# EAGLE board PIC16F727 MCU v1.1_2 (EAGLE 5.07)
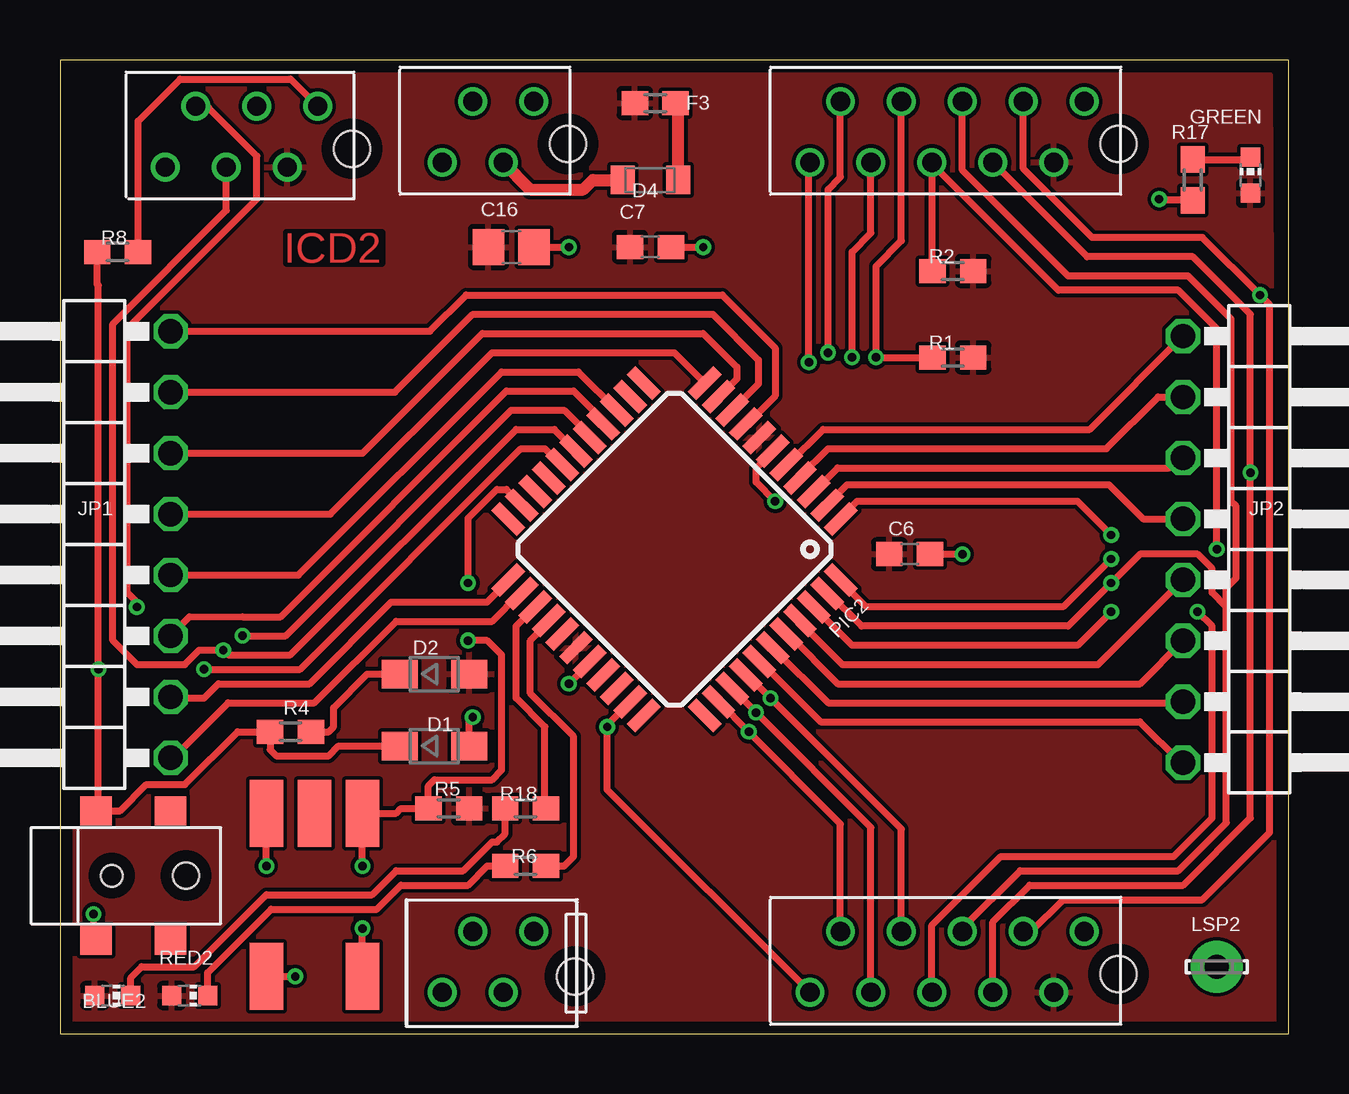
[diagram p0: board, top side]
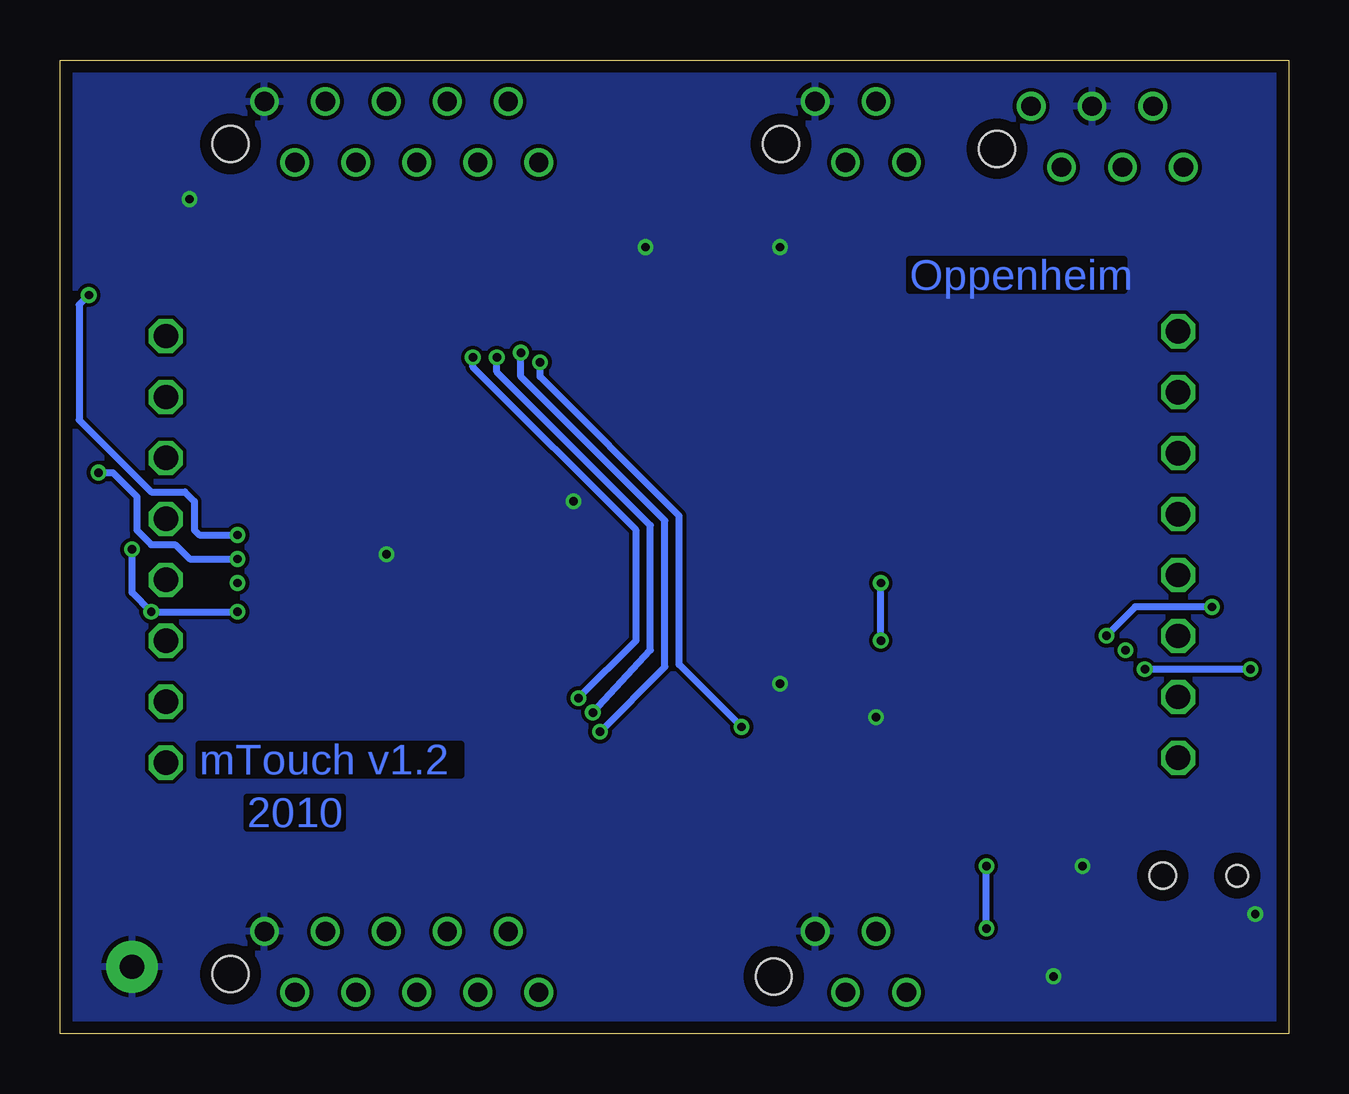
[diagram p1: board, bottom side, seen from below]

Size 51.2 x 40.6 mm. Coordinates in mm from the lower left corner, seen from the top.
Outline: 0,0 51.2,0 51.2,40.6 0,40.6 0,0
Copper layers (1*16): Top 0.035mm / dielectric 1.5mm / Bottom 0.035mm
Design rules "PCB-POOL - 2 layer, edited *": minimum track width 6mil, minimum drill 12mil, track to track 6mil, track to pad 8mil, pad to pad 6mil, via to via 6mil, smd to smd 6mil, copper to edge 20mil, drill to drill 8mil, minimum pad ring 8mil, minimum via ring 6mil, stop-mask expansion 3mil, vias tented up to drill 0.35mm, thermal gap 8mil

## Footprints (pad centres in the part's own frame; a part is rotated, then mirrored left to right if it is on the bottom)
CHIP-LED0603 = smd 0.8 x 0.8: A 0,-0.75; C 0,0.75
C0603 = smd 1.1 x 1: 1 -0.85,0; 2 0.85,0
C0805 = smd 1.3 x 1.5: 1 -0.95,0; 2 0.95,0
MICROMATCH-6H = drill 0.8 round: P1 -3.81,-1.27; P2 -2.54,1.27; P3 -1.27,-1.27; P4 0,1.27; P5 1.27,-1.27; P6 2.54,1.27 | hole 1.5: 3.96,-0.5
MICROMATCH-4H-PLUGWITHHOLE = drill 0.8 round: .1 1.27,1.27; .2 0,-1.27; .3 -1.27,1.27; .4 -2.54,-1.27 | hole 1.5: -4.26,0.6
MICROMATCH-4H = drill 0.8 round: P1 -1.27,-1.27; P2 0,1.27; P3 1.27,-1.27; P4 2.54,1.27 | hole 1.5: 3.96,-0.5
MICROMATCH-10H = drill 0.8 round: P1 -6.35,-1.27; P2 -5.08,1.27; P3 -3.81,-1.27; P4 -2.54,1.27; P5 -1.27,-1.27; P6 0,1.27; P7 1.27,-1.27; P8 2.54,1.27; P9 3.81,-1.27; P10 5.08,1.27 | hole 1.5: 6.5,-0.5
SOD323-W = smd 1.5 x 1.2: A 1.45,0; C -1.45,0
SOD110-W = smd 1 x 1.2: A 1.15,0; C -1.15,0
R0603 = smd 1.1 x 1: 1 -0.85,0; 2 0.85,0
1X08/90 = drill 1.016 octagon: 1 -8.89,-3.81; 2 -6.35,-3.81; 3 -3.81,-3.81; 4 -1.27,-3.81; 5 1.27,-3.81; 6 3.81,-3.81; 7 6.35,-3.81; 8 8.89,-3.81
LSP10 = drill 1.016 pad 2.159 round: MP 0,0
TQFP44 = smd 1.5 x 0.5: 1 -5.8,4; 2 -5.8,3.2; 3 -5.8,2.4; 4 -5.8,1.6; 5 -5.8,0.8; 6 -5.8,0; 7 -5.8,-0.8; 8 -5.8,-1.6; 9 -5.8,-2.4; 10 -5.8,-3.2; 11 -5.8,-4; 23 5.8,-4; 24 5.8,-3.2; 25 5.8,-2.4; 26 5.8,-1.6; 27 5.8,-0.8; 28 5.8,0; 29 5.8,0.8; 30 5.8,1.6; 31 5.8,2.4; 32 5.8,3.2; 33 5.8,4 | smd 0.5 x 1.5: 12 -4,-5.8; 13 -3.2,-5.8; 14 -2.4,-5.8; 15 -1.6,-5.8; 16 -0.8,-5.8; 17 0,-5.8; 18 0.8,-5.8; 19 1.6,-5.8; 20 2.4,-5.8; 21 3.2,-5.8; 22 4,-5.8; 34 4,5.8; 35 3.2,5.8; 36 2.4,5.8; 37 1.6,5.8; 38 0.8,5.8; 39 0,5.8; 40 -0.8,5.8; 41 -1.6,5.8; 42 -2.4,5.8; 43 -3.2,5.8; 44 -4,5.8
SDS_SIDE_ACTUATED_SWITCH = smd 1.3 x 1.2: 1 2.1,2.7; 2 2.1,-2.7; 3 -1,2.7; 4 -1,-2.7 | hole 1.1: -1.65,0 | hole 0.9: 1.45,0
DTSL-61K-B = smd 2.8 x 1.4: P$1 -3.4,2; P$2 3.4,2; P$3 -3.4,-2; P$4 3.4,-2; P$5 3.4,0

## Placement (x,y rotation side)
BLUE2  LED  [CHIP-LED0603]  2.2,1.6 270 top
C6  0.1uF  [C0603]  35.4,20 0 top
C7  1uF  [C0603]  24.6,32.8 0 top
C16  10uF  [C0805]  18.8,32.8 0 top
CON2  MICROMATCH_6  [MICROMATCH-6H]  8.2,37.4 0 top
CON3  MICROMATCH_4  [MICROMATCH-4H-PLUGWITHHOLE]  17.2,3 180 top
CON4  MICROMATCH_4SOCKET  [MICROMATCH-4H]  17.2,37.6 0 top
CON5  MICROMATCH_10HORIZONTAL  [MICROMATCH-10H]  37.6,37.6 0 top
CON7  MICROMATCH_10HORIZONTAL  [MICROMATCH-10H]  37.6,3 0 top
D1  8.2V  [SOD323-W]  15.6,12 0 top
D2  schottky  [SOD323-W]  15.6,15 0 top
D4  BAT254  [SOD110-W]  24.6,35.6 180 top
F3  FUSE-SMT  [R0603]  24.8,38.8 180 top
GREEN  LED  [CHIP-LED0603]  49.6,35.8 0 top
JP1  HEADER  [1X08/90]  0.8,20.4 90 top
JP2  HEADER  [1X08/90]  50.6,20.2 270 top
LSP2  LSP10  [LSP10]  48.2,2.8 0 top
PIC2  PIC16F727PT  [TQFP44]  25.6,20.2 225 top
R1  10k  [R0603]  37.2,28.2 180 top
R2  10k  [R0603]  37.2,31.8 180 top
R4  10k  [R0603]  9.6,12.6 0 top
R5  10k  [R0603]  16.2,9.4 180 top
R6  330  [R0603]  19.4,7 180 top
R8  390  [R0603]  2.4,32.6 0 top
R17  330  [R0603]  47.2,35.6 270 top
R18  100  [R0603]  19.4,9.4 180 top
RED2  LED  [CHIP-LED0603]  5.4,1.6 270 top
S1  SDS-SWITCHSAD  [SDS_SIDE_ACTUATED_SWITCH]  3.6,6.6 180 top
U$2  DTSGL-61K-B  [DTSL-61K-B]  10.6,5.8 90 top

## Library data of the parts
BLUE2 GREEN RED2 = led
C6 C7 C16 R1 R2 R4-R6 R8 R17 R18 = rcl
CON2 CON3 CON5 CON7 = con-Micromatch
CON4 = Tony Peyton
D1 D2 = diode
D4 = Dot boards
F3 = Temp
JP1 JP2 = Touch Sensors
LSP2 = Momo
PIC2 = Microchip
S1 = Cube
U$2 = Switches

## Nets
!LOWBATT: CON4.P2
!MCLR: D1.C PIC2.18 R4.1 R8.1 S1.2
!SHDN: CON4.P1
!SS: PIC2.19
AGND: C6.2 C7.2 C16.2 CON2.P4 CON3..4 CON4.P4 CON5.P10 CON7.P10 D1.A LSP2.MP PIC2.6 PIC2.29 R17.2 S1.1 U$2.P$1 U$2.P$2
ICSPCLK: CON2.P2 PIC2.16
ICSPDAT: CON2.P3 PIC2.17
LED1: PIC2.25 R18.1
LED2: PIC2.26 R6.1
N$1: D2.C R4.2
N$4: R6.2 RED2.C
N$14: GREEN.C R17.1
N$17: CON2.P6 R8.2
N$20: D4.C F3.1
N$22: BLUE2.C R18.2
RA2: PIC2.21 R5.2 U$2.P$3 U$2.P$4
RA4/CPS6: JP1.2 PIC2.23
RA5/CPS7: JP1.1 PIC2.24
RB0/CPS0: JP1.8 PIC2.8
RB1/CPS1: JP1.7 PIC2.9
RB2/CPS2: JP1.6 PIC2.10
RB3/CPS3: JP1.5 PIC2.11
RB4/CPS4: JP1.4 PIC2.14
RB5/CPS5: JP1.3 PIC2.15
RC0: CON5.P1 CON7.P1 PIC2.32
RC1: CON5.P2 CON7.P2 PIC2.35
RC2: CON5.P3 CON7.P3 PIC2.36
RC3/SCK/SCL: CON5.P4 CON7.P4 PIC2.37 R1.2
RC4/SDI/SDA: CON5.P5 CON7.P5 PIC2.42 R2.2
RC5/SDO: CON5.P6 CON7.P6 PIC2.43
RC6/TX: CON5.P7 CON7.P7 PIC2.44
RC7/RX: CON5.P8 CON7.P8 PIC2.1
RD0/CPS8: JP2.8 PIC2.38
RD1/CPS9: JP2.7 PIC2.39
RD2/CPS10: JP2.6 PIC2.40
RD3/CPS11: JP2.5 PIC2.41
RD4/CPS12: JP2.4 PIC2.2
RD5/CPS13: JP2.3 PIC2.3
RD6/CPS14: JP2.2 PIC2.4
RD7/CPS15: JP2.1 PIC2.5
V+: BLUE2.A C6.1 C7.1 C16.1 CON2.P5 CON5.P9 CON7.P9 D2.A F3.2 GREEN.A PIC2.7 PIC2.28 R1.1 R2.1 R5.1 RED2.A
VOUT: CON4.P3 D4.A
VREF: PIC2.22

## Tracks (layer width: path | path; a pad name or v marks a point on that pad's centre or on a via)
!MCLR  (via drill 0.35)
  Top 0.3: v6,15.2 10,15.2 19.2,24.4 20.2,24.4 20.86,23.73 PIC2.18 | R8.1 1.55,31.25 1.6,31.2 v1.6,15.2 1.6,9.4 S1.2 2.5,9.3 3.6,10.4 5.2,10.4 7.4,12.6 R4.1 8.75,11.85 9,11.6 11.2,11.6 11.6,12 D1.C
  Bottom 0.3: v1.6,15.2 v6,15.2
AGND  (via drill 0.35)
  Top 0.3: PIC2.29 22.06,15.46 v21.2,14.6 | PIC2.6 29,23.6 29,23 v29.8,22.2 | C6.2 v37.6,20 | C16.2 v21.2,32.8 | C7.2 v26.8,32.8 | R17.2 45.85,34.75 v45.8,34.8 | v8.6,7 U$2.P$2 | U$2.P$1 v9.8,2.4 | D1.A 17.05,13.05 v17.2,13.2 | v1.4,5 1.4,4 S1.1
  pour Bottom: 50.8,40.2 50.8,0.2 0.4,0.2 0.4,40.2
ICSPCLK  (via drill 0.35)
  Top 0.3: PIC2.16 22.06,24.94 21,26 18.8,26 9.4,16.6 v7.6,16.6 | v3.2,17.8 3.2,18 2.8,18.4 2.8,29.4 8.2,34.8 8.2,36.6 6.2,38.6 5.73,38.6 CON2.P2
  Bottom 0.3: v3.2,17.8 6.4,17.8 v7.6,16.6
ICSPDAT  (via drill 0.35)
  Top 0.3: PIC2.17 20.6,25.2 19,25.2 9.6,15.8 7,15.8 v6.8,16 5.8,16 5.2,15.4 3.2,15.4 2.2,16.4 2.2,29.6 6.93,34.33 CON2.P3
LED1
  Top 0.3: PIC2.25 19,17 19,14 20.2,12.8 20.2,9.45 R18.1
LED2
  Top 0.3: PIC2.26 20.37,17.17 19.6,16.4 19.6,14.2 21.4,12.4 21.4,7.4 21,7 R6.1
N$1
  Top 0.3: R4.2 11.2,12.6 11.4,12.8 11.4,13.6 12.8,15 D2.C
N$4
  Top 0.3: RED2.C 6.15,2.55 8.8,5.2 13.2,5.2 14.2,6.2 17,6.2 17.8,7 R6.2
N$14
  Top 0.3: R17.1 49.5,36.45 GREEN.C
N$17
  Top 0.3: R8.2 3.25,38.05 5,39.8 9.61,39.8 CON2.P6
N$20
  Top 0.3: 25.75,38.7 F3.1
  Top 0.508: D4.C 25.75,38.7
N$22
  Top 0.3: R18.2 18.55,8.35 18.2,8 18,8 16.8,6.8 14,6.8 13,5.8 8.6,5.8 5.6,2.8 3.4,2.8 2.95,2.35 BLUE2.C
RA2  (via drill 0.35)
  Top 0.3: v12.6,7 U$2.P$4 14,9.2 14.2,9.4 R5.2 15.35,10.35 15.6,10.6 18,10.6 18.4,11 18.4,15.8 17.8,16.4 v17,16.4 | U$2.P$3 v12.6,4.4 | PIC2.21 19.24,22.06 18.6,22.7 18.2,22.7 17,21.5 v17,18.8
  Bottom 0.3: v17,16.4 v17,18.8 | v12.6,4.4 v12.6,7
RA4/CPS6
  Top 0.3: JP1.2 4.66,14 6,14 6.6,14.6 10.4,14.6 13.8,18 17.8,18 18.67,18.87 PIC2.23
RA5/CPS7
  Top 0.3: JP1.1 4.71,11.51 7,13.8 10.6,13.8 14,17.2 18,17.2 19.16,18.36 PIC2.24
RB0/CPS0
  Top 0.3: PIC2.8 28.63,25.43 29.8,26.6 29.8,28.6 27.6,30.8 16.92,30.8 15.41,29.29 JP1.8
RB1/CPS1
  Top 0.3: PIC2.9 29.1,27.1 29.1,28.1 27.2,30 17.2,30 13.95,26.75 JP1.7
RB2/CPS2
  Top 0.3: JP1.6 12.61,24.21 17.6,29.2 26.8,29.2 28.2,27.8 28.2,27.3 27.46,26.56 PIC2.10
RB3/CPS3
  Top 0.3: PIC2.11 25.6,28.4 18,28.4 11.27,21.67 JP1.5
RB4/CPS4
  Top 0.3: PIC2.14 21.6,27.6 18.4,27.6 9.93,19.13 JP1.4
RB5/CPS5
  Top 0.3: JP1.3 5.4,17.4 7.61,17.39 9.19,17.39 18.6,26.8 21.4,26.8 22.63,25.57 PIC2.15
RC0  (via drill 0.35)
  Top 0.3: 23.76,13.76 PIC2.32 22.8,12.87 v22.8,12.8 22.8,10.18 CON7.P1 | v31.2,28 31.2,36.08 CON5.P1
  Bottom 0.3: v22.8,12.8 25.4,15.4 25.4,21.6 31.2,27.4 v31.2,28
RC1  (via drill 0.35)
  Top 0.3: CON7.P2 32.52,8.75 28.5,12.77 v28.7,12.6 27.46,13.84 PIC2.35 | v32,28.4 32,35.2 32.52,35.72 CON5.P2
  Bottom 0.3: v28.7,12.6 26,15.3 26,21.4 32,27.4 v32,28.4
RC2  (via drill 0.35)
  Top 0.3: PIC2.36 v29,13.41 v29,13.4 33.79,8.61 CON7.P3 | CON5.P3 33.79,33.39 33,32.6 v33,28.2
  Bottom 0.3: v29,13.4 26.6,16 26.6,21.2 33,27.6 v33,28.2
RC3/SCK/SCL  (via drill 0.35)
  Top 0.3: PIC2.37 28.63,14.97 v29.6,14 35.06,8.54 CON7.P4 | CON5.P4 35.06,33.06 34,32 v34,28.2 R1.2
  Bottom 0.3: v29.6,14 27.2,16.4 27.2,21 34,27.8 v34,28.2
RC4/SDI/SDA  (via drill 0.35)
  Top 0.3: PIC2.42 33,16.2 42.4,16.2 v43.8,17.6 | 36.33,36.27 CON5.P5 | 36.33,36.27 41.6,31 46.6,31 48.2,29.4 v48.2,20.2 | CON7.P5 36.33,4.53 39.2,7.4 46.4,7.4 48,9 48,17 v47.4,17.6 | 36.33,36.27 36.33,31.82 R2.2
  Bottom 0.3: v48.2,20.2 48.2,18.4 v47.4,17.6 | v47.4,17.6 v43.8,17.6 | v47.4,17.6 47.6,17.6
RC5/SDO  (via drill 0.35)
  Top 0.3: PIC2.43 32.04,18.36 33.4,17 42,17 v43.8,18.8 45,20 47.4,20 48,19.4 48,18.4 48.6,17.8 | CON5.P6 37.6,36 42,31.6 47,31.6 48.8,29.8 48.8,22.2 49,22 49,19 48.6,18.6 48.6,17.8 | CON7.P6 37.6,4.4 40,6.8 46.6,6.8 48.6,8.8 48.6,17.8
RC6/TX  (via drill 0.35)
  Top 0.3: PIC2.44 32.53,18.87 33.6,17.8 41.8,17.8 v43.8,19.8 | CON5.P7 42.8,32.4 47.2,32.4 49.6,30 v49.6,23.4 49.6,9 46.8,6.2 40.4,6.2 38.87,4.67 CON7.P7
  Bottom 0.3: v43.8,19.8 45.8,19.8 46.4,20.4 47.4,20.4 48,21 48,22.4 49,23.4 v49.6,23.4
RC7/RX  (via drill 0.35)
  Top 0.3: PIC2.1 32.53,21.53 33.2,22.2 42.4,22.2 v43.8,20.8 | CON5.P8 40.14,36.06 43,33.2 47.6,33.2 v50,30.8 50.4,30.4 50.4,8.4 47.6,5.6 41.8,5.6 40.47,4.27 CON7.P8
  Bottom 0.3: v43.8,20.8 45.4,20.8 45.6,21 45.6,22.2 46,22.6 47.4,22.6 50.4,25.6 50.4,30.4 v50,30.8
RD0/CPS8
  Top 0.3: PIC2.38 29.17,15.53 31.69,13.01 44.99,13.01 46.69,11.31 JP2.8
RD1/CPS9
  Top 0.3: PIC2.39 32,13.8 46.34,13.8 JP2.7
RD2/CPS10
  Top 0.3: PIC2.40 30.34,16.66 32.4,14.6 45,14.6 JP2.6
RD3/CPS11
  Top 0.3: PIC2.41 30.83,17.17 32.6,15.4 43.26,15.4 JP2.5
RD4/CPS12
  Top 0.3: PIC2.2 31.96,22.06 32.8,22.9 43.7,22.9 45.13,21.47 JP2.4
RD5/CPS13
  Top 0.3: PIC2.3 32.4,23.6 46.2,23.6 JP2.3
RD6/CPS14
  Top 0.3: PIC2.4 30.87,23.17 30.87,23.27 32,24.4 43.6,24.4 45.75,26.55 JP2.2
RD7/CPS15
  Top 0.3: PIC2.5 30.27,23.77 30.37,23.77 31.8,25.2 42.9,25.2 JP2.1
V+
  pour Top: 0.4,40 50.4,40 50.6,0.4 0.6,0.2
VOUT
  Top 0.508: CON4.P3 19.6,35.2 21.8,35.2 22.2,35.6 D4.A

## Text on the board
Top: ICD2
Bottom: Oppenheim | mTouch v1.2 | 2010